# EAGLE board MMA7361-v12 (EAGLE 6.2)
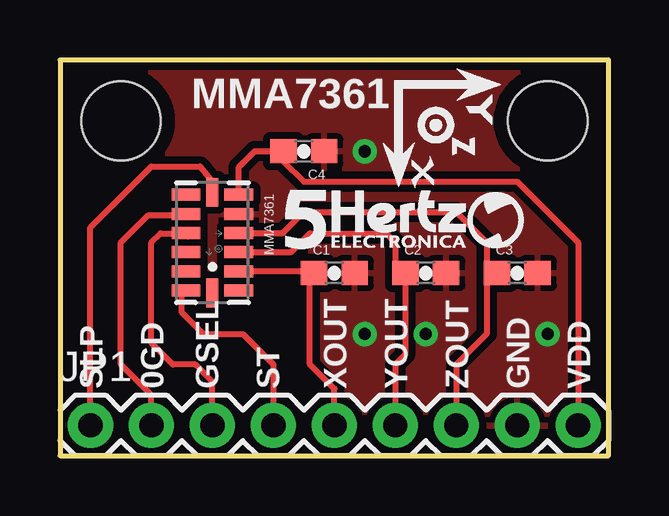
[diagram p0: board, top side]
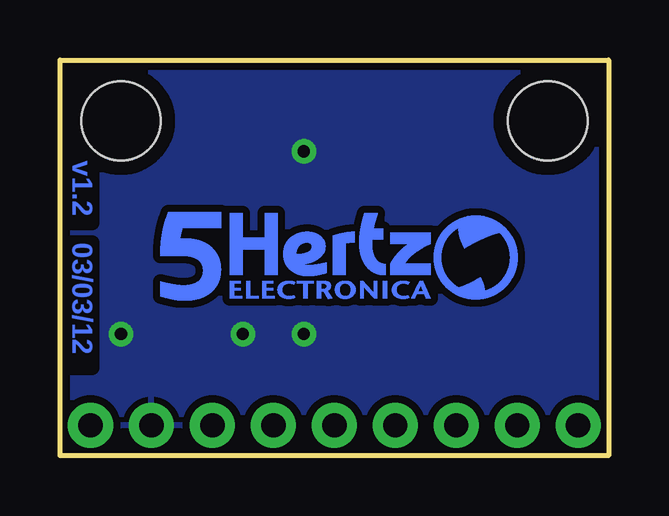
[diagram p1: board, bottom side, seen from below]

Size 22.86 x 16.51 mm. Coordinates in mm from the lower left corner, seen from the top.
Outline: 0,0 22.86,0 22.86,16.51 0,16.51 0,0
Copper layers (1*16): Top 0.035mm / dielectric 1.5mm / Bottom 0.035mm
Design rules: minimum track width 8mil, minimum drill 20mil, track to track 8mil, track to pad 8mil, pad to pad 8mil, via to via 8mil, smd to smd 8mil, copper to edge 10mil, drill to drill 8mil, minimum pad ring 12mil, minimum via ring 10mil, stop-mask expansion 4mil, vias tented up to drill 25mil, thermal gap 10mil

## Footprints (pad centres in the part's own frame; a part is rotated, then mirrored left to right if it is on the bottom)
0603-CAP = smd 1.1 x 1: 1 -0.85,0; 2 0.85,0
1X09 = drill 1.016 pad 1.88: 1 0,0; 2 2.54,0; 3 5.08,0; 4 7.62,0; 5 10.16,0; 6 12.7,0; 7 15.24,0; 8 17.78,0; 9 20.32,0
STAND-OFF = hole 3.302: 0,0
LGA14 = smd 0.5 x 1.2: 1 2,1.1; 2 1.2,1.1; 3 0.4,1.1; 4 -0.4,1.1; 5 -1.2,1.1; 6 -2,1.1; 8 -2,-1.1; 9 -1.2,-1.1; 10 -0.4,-1.1; 11 0.4,-1.1; 12 1.2,-1.1; 13 2,-1.1 | smd 1.2 x 0.5: 7 -2.1,0; 14 2.1,0

## Placement (x,y rotation side)
C1  3.3nF  [0603-CAP]  11.43,7.62 0 top
C2  3.3nF  [0603-CAP]  15.24,7.62 0 top
C3  3.3nF  [0603-CAP]  19.05,7.62 0 top
C4  0.1uF  [0603-CAP]  10.16,12.7 180 top
JP1  M09  [1X09]  1.27,1.27 0 top
JP2  STAND-OFF  [STAND-OFF]  2.54,13.97 0 top
JP3  STAND-OFF  [STAND-OFF]  20.32,13.97 0 top
LOGO2  LOGO_5HZ_H_COOPER_15MM  [5HZ_LOGO_H_COOPER_15MM]  18.67,6.48 0 bottom
LOGO3  LOGO_5HZ_H_10MM  [5HZ_LOGO_H_10MM]  9.4,8.64 0 top
MMA7361  40000  [LGA14]  6.35,8.89 270 top
U$3  EJES_CARTESIANO_5MM  [EJE_CARTESIANO_5MM]  13.46,16.13 270 top

## Library data of the parts
C1-C4 JP1-JP3 MMA7361 = SparkFun
LOGO2 LOGO3 U$3 = 5hz-electronica

## Nets
0GD: JP1.2 MMA7361.9
GND: C1.2 C2.2 C3.2 C4.1 JP1.8 MMA7361.5
GSEL: JP1.3 MMA7361.10
SLEEP: JP1.1 MMA7361.7
STP: JP1.4 MMA7361.13
VDD: C4.2 JP1.9 MMA7361.6
XOUT: C1.1 JP1.5 MMA7361.2
YOUT: C2.1 JP1.6 MMA7361.3
ZOUT: C3.1 JP1.7 MMA7361.4

## Tracks (layer width: path | path; a pad name or v marks a point on that pad's centre or on a via)
0GD
  Top 0.254: JP1.2 3.81,2.54 2.54,3.81 2.54,8.89 3.68,10.03 5.19,10.03 MMA7361.9 5.15,10.09 5.08,10.16
GND  (via drill 0.51)
  other vias: 12.7,5.08 15.24,5.08 20.32,5.08 12.7,12.7
  pour Top (isolate 0.305): 0,16.51 0,0 22.86,0 22.86,16.51
  pour Bottom (isolate 0.305): 0,16.51 22.86,16.51 22.86,0 0,0
GSEL
  Top 0.254: JP1.3 6.35,3.09 5.63,3.81 4.71,3.81 3.81,4.71 3.81,8.89 4.19,9.27 5.23,9.27 MMA7361.10 5.33,9.14
SLEEP
  Top 0.254: JP1.1 1.27,9.53 3.81,12.07 5.84,12.07 6.35,11.43 MMA7361.7
STP
  Top 0.254: 4.83,6.86 4.86,6.89 MMA7361.13 5.08,6.99 5.08,5.98 5.98,5.08 7.62,5.08 8.89,3.81 JP1.4
VDD
  Top 0.254: MMA7361.6 7.45,12.04 8.11,12.7 C4.2 9.31,12.28 10.16,11.43 19.05,11.43 21.59,8.89 JP1.9
XOUT
  Top 0.254: MMA7361.2 10.09,7.69 10.16,7.62 C1.1 10.41,7.37 10.41,3.81 11.43,2.79 JP1.5
YOUT
  Top 0.254: MMA7361.3 9.63,8.49 10.41,9.27 13.59,9.27 13.97,8.89 13.97,8.04 C2.1 | C2.1 13.97,7.62 | C2.1 14.39,4.23 13.97,3.81 JP1.6
ZOUT
  Top 0.254: MMA7361.4 9.29,9.29 10.16,10.16 16.51,10.16 17.78,8.89 17.78,8.04 C3.1 17.78,7.2 17.78,5.08 16.51,3.81 JP1.7

## Text on the board
Bottom: v1.2 | 03/03/12
tPlace: MMA7361 | SLP | 0GD | GSEL | ST | XOUT | YOUT | ZOUT | GND | VDD